# EAGLE board aurdino 21 (EAGLE 9.7.0)

Size 185.27 x 57.52 mm. Coordinates in mm from the lower left corner, seen from the top.
Outline: 0,0 185.27,0 185.27,57.52 0,57.52 0,0
Copper layers (1*16): Top 0.035mm / dielectric 1.5mm / Bottom 0.035mm
Design rules "default": minimum track width 6mil, minimum drill 0.35mm, track to track 6mil, track to pad 6mil, pad to pad 6mil, via to via 6mil, smd to smd 6mil, copper to edge 40mil, drill to drill 6mil, minimum pad ring 10mil, minimum via ring 8mil, stop-mask expansion 4mil, vias tented up to drill 0mil, thermal gap 10mil

## Footprints (pad centres in the part's own frame; a part is rotated, then mirrored left to right if it is on the bottom)
BATTERY-GENERIC = drill 1.118 pad 3.15 octagon: + 2.54,0; - -2.54,0
LEDRD254W60D565H860B = drill 0.981 pad 1.581: 1 -1.27,0; 2 1.27,0
LEDRD254W60D565H860B_G = drill 0.981 pad 1.581: 1 -1.27,0; 2 1.27,0
LEDRD254W60D565H860B_B = drill 0.981 pad 1.581: 1 -1.27,0; 2 1.27,0
MOTOR = drill 1.118 pad 3.15 octagon: + 2.54,0; - -2.54,0
PIEZO = drill 1 pad 1.6: 1 -3.5,0; 2 3.5,0
RESAD1016W63L850D250B = drill 0.83 pad 1.43: 1 -5.08,0; 2 5.08,0
SWITCH-SPDT-PTH-8.5X3.7MM = drill 1.016 pad 1.88: 1 -2.54,0; 2 0,0; 3 2.54,0
SWITCH-MOMENTARY-PTH-6.5MM = drill 1.016 pad 1.88: 1 -3.251,2.261; 2 3.251,2.261; 3 -3.251,-2.261; 4 3.251,-2.261

## Placement (x,y rotation side)
BAT1  9V  [BATTERY-GENERIC]  8.26,30.17 270 top
D1  RED  [LEDRD254W60D565H860B]  21.81,13.72 180 top
D2  GREEN  [LEDRD254W60D565H860B_G]  42.13,13.72 180 top
D3  BLUE  [LEDRD254W60D565H860B_B]  57.37,13.72 180 top
M1  MOTOR_HDR  [MOTOR]  91.35,47.78 0 top
M2  MOTOR_HDR  [MOTOR]  119.34,49.14 0 top
PIEZO1  PIEZO  [PIEZO]  173.53,43.94 0 top
R1  1k  [RESAD1016W63L850D250B]  56.1,26.42 90 top
R2  1k  [RESAD1016W63L850D250B]  40.86,26.42 90 top
R3  1k  [RESAD1016W63L850D250B]  20.54,26.42 90 top
S1  TOGGLE  [SWITCH-SPDT-PTH-8.5X3.7MM]  25.62,11.18 0 top
S2  TOGGLE  [SWITCH-SPDT-PTH-8.5X3.7MM]  45.94,11.18 0 top
S3  TOGGLE  [SWITCH-SPDT-PTH-8.5X3.7MM]  61.18,11.18 0 top
S4  SWITCH_MOMENTARY  [SWITCH-MOMENTARY-PTH-6.5MM]  170.4,7.37 90 top
S5  TOGGLE  [SWITCH-SPDT-PTH-8.5X3.7MM]  122.14,16.26 0 top
S6  TOGGLE  [SWITCH-SPDT-PTH-8.5X3.7MM]  96.74,16.26 0 top

## Library data of the parts
BAT1 M1 M2 PIEZO1 R1-R3 S1-S6 = Tinkercad
D1 = Tinkercad; CATEGORY: Opto-Electronic; SUB-CATEGORY: LED; VALUE: LED_RED
D2 = Tinkercad; CATEGORY: Opto-Electronic; SUB-CATEGORY: LED; VALUE: LED_GREEN
D3 = Tinkercad; CATEGORY: Opto-Electronic; SUB-CATEGORY: LED; VALUE: LED_BLUE

## Nets
BAT1+: BAT1.+ PIEZO1.1 S1.2 S2.2 S3.2 S5.1 S6.2
BAT1-: BAT1.- M1.- M2.- R1.2 R2.2 R3.2 S4.1 S4.2
D1_C: D1.2 R3.1
D2_C: D2.2 R2.1
D3_C: D3.2 R1.1
M1_+: M1.+ S6.1
M2_+: M2.+ S5.2
S1_O: D1.1 S1.1
S2_O: D2.1 S2.1
S3_O: D3.1 S3.1
S4_3: PIEZO1.2 S4.3 S4.4

## Tracks (layer width: path | path; a pad name or v marks a point on that pad's centre or on a via)
BAT1+  (6 unrouted)
BAT1-  (7 unrouted)
D1_C  (1 unrouted)
D2_C  (1 unrouted)
D3_C  (1 unrouted)
M1_+  (1 unrouted)
M2_+  (1 unrouted)
S1_O  (1 unrouted)
S2_O  (1 unrouted)
S3_O  (1 unrouted)
S4_3  (2 unrouted)